# Altium PCB XBEE_BREAKOUT.PcbDoc
Units mil, origin at the board's own origin, x right, y up, seen from the top; angles counter-clockwise.
Board outline 2080 x 2075 mil, 2 copper layers (Top Layer, Bottom Layer); 9 components, 23 nets, 79 pads, 32 vias.
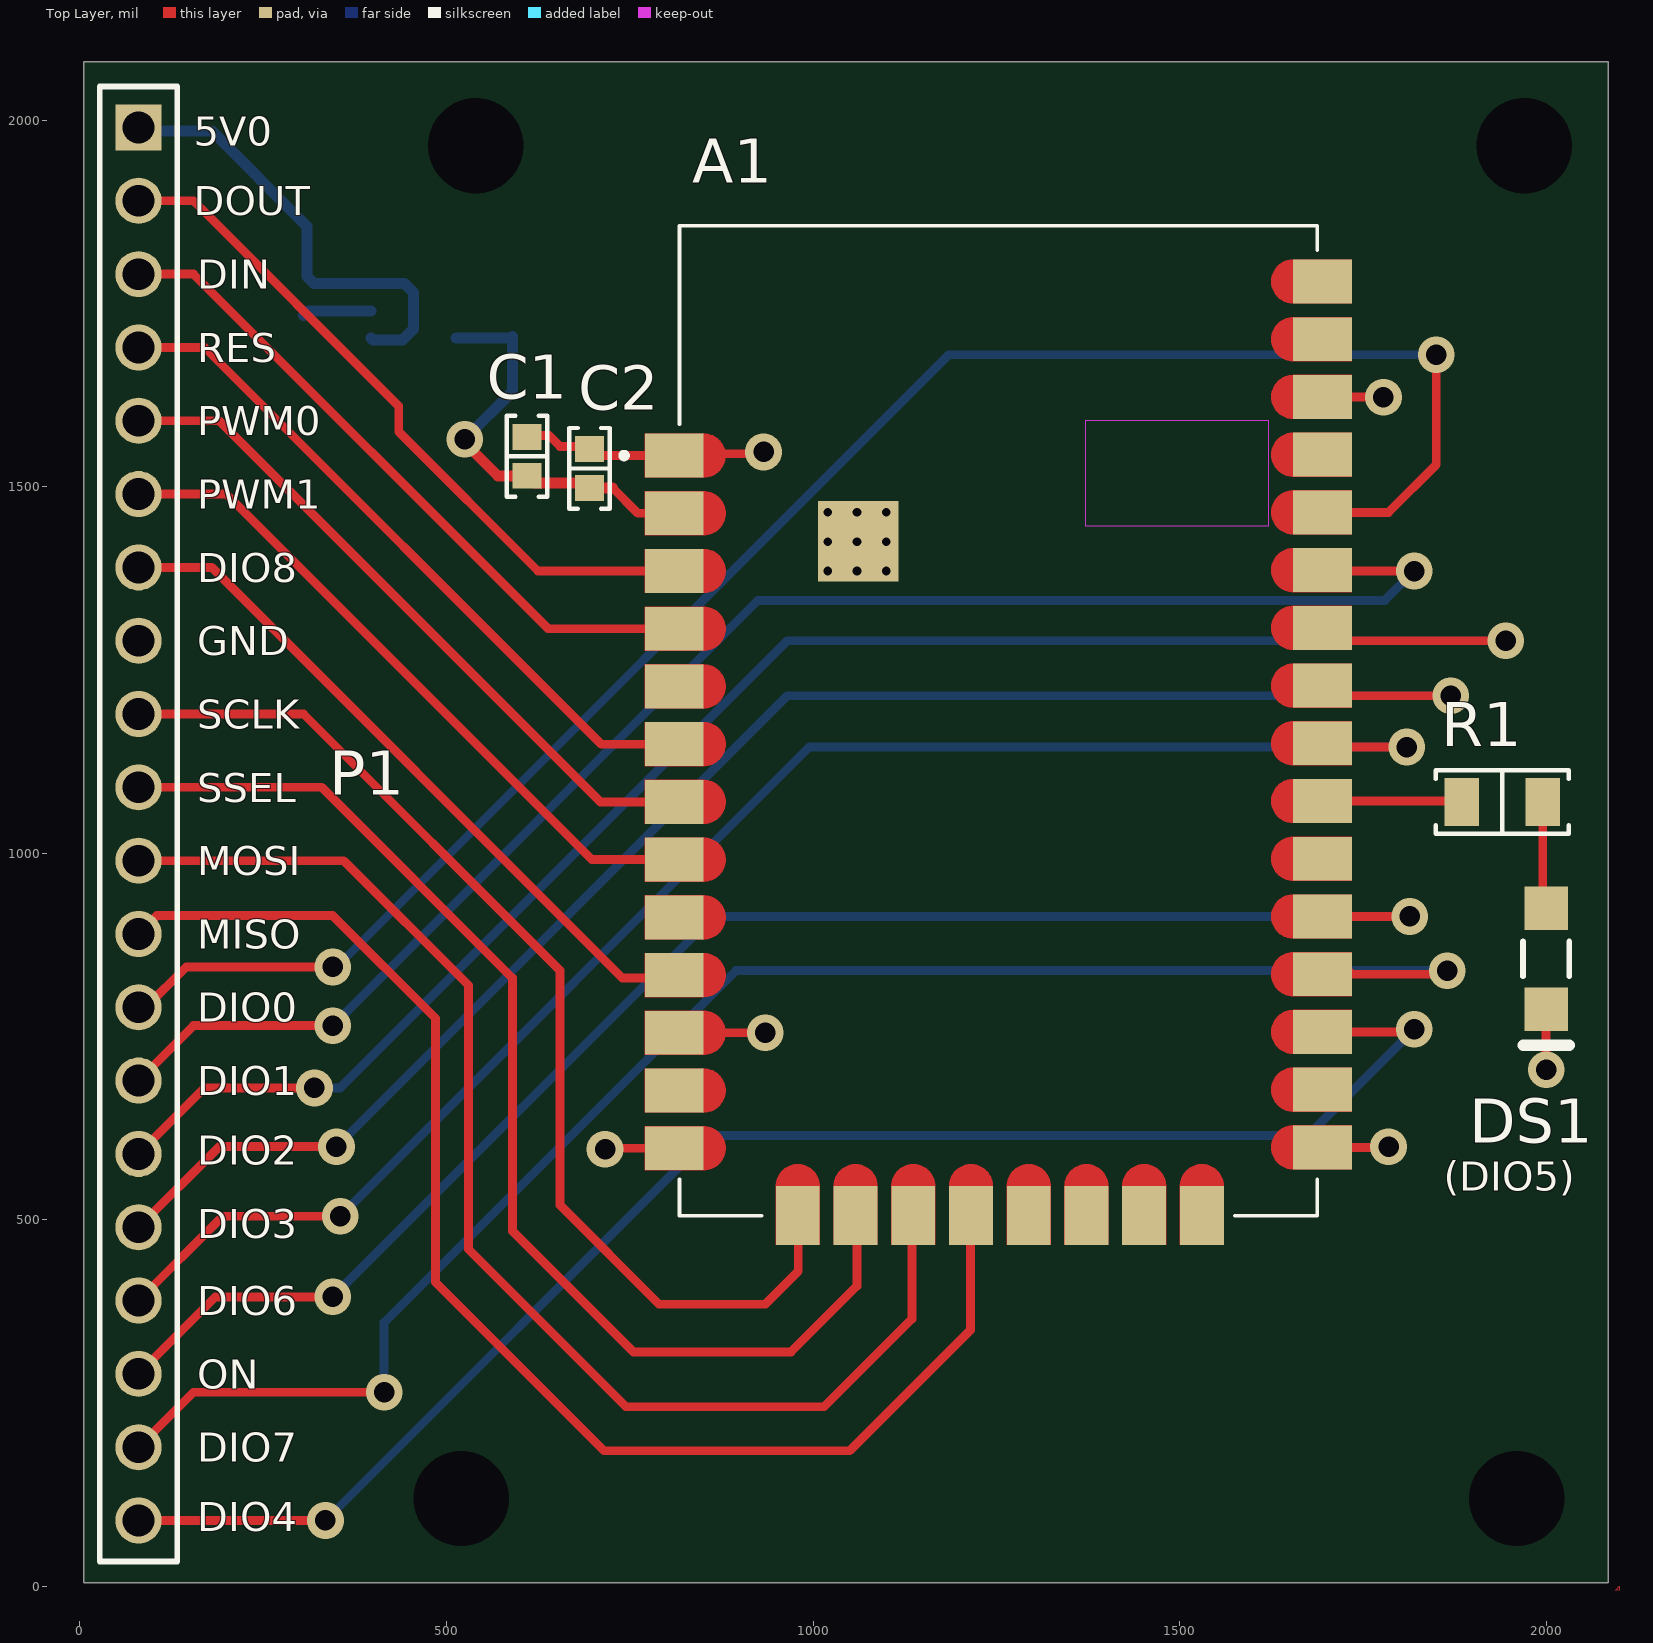
[diagram p0: Top Layer view]
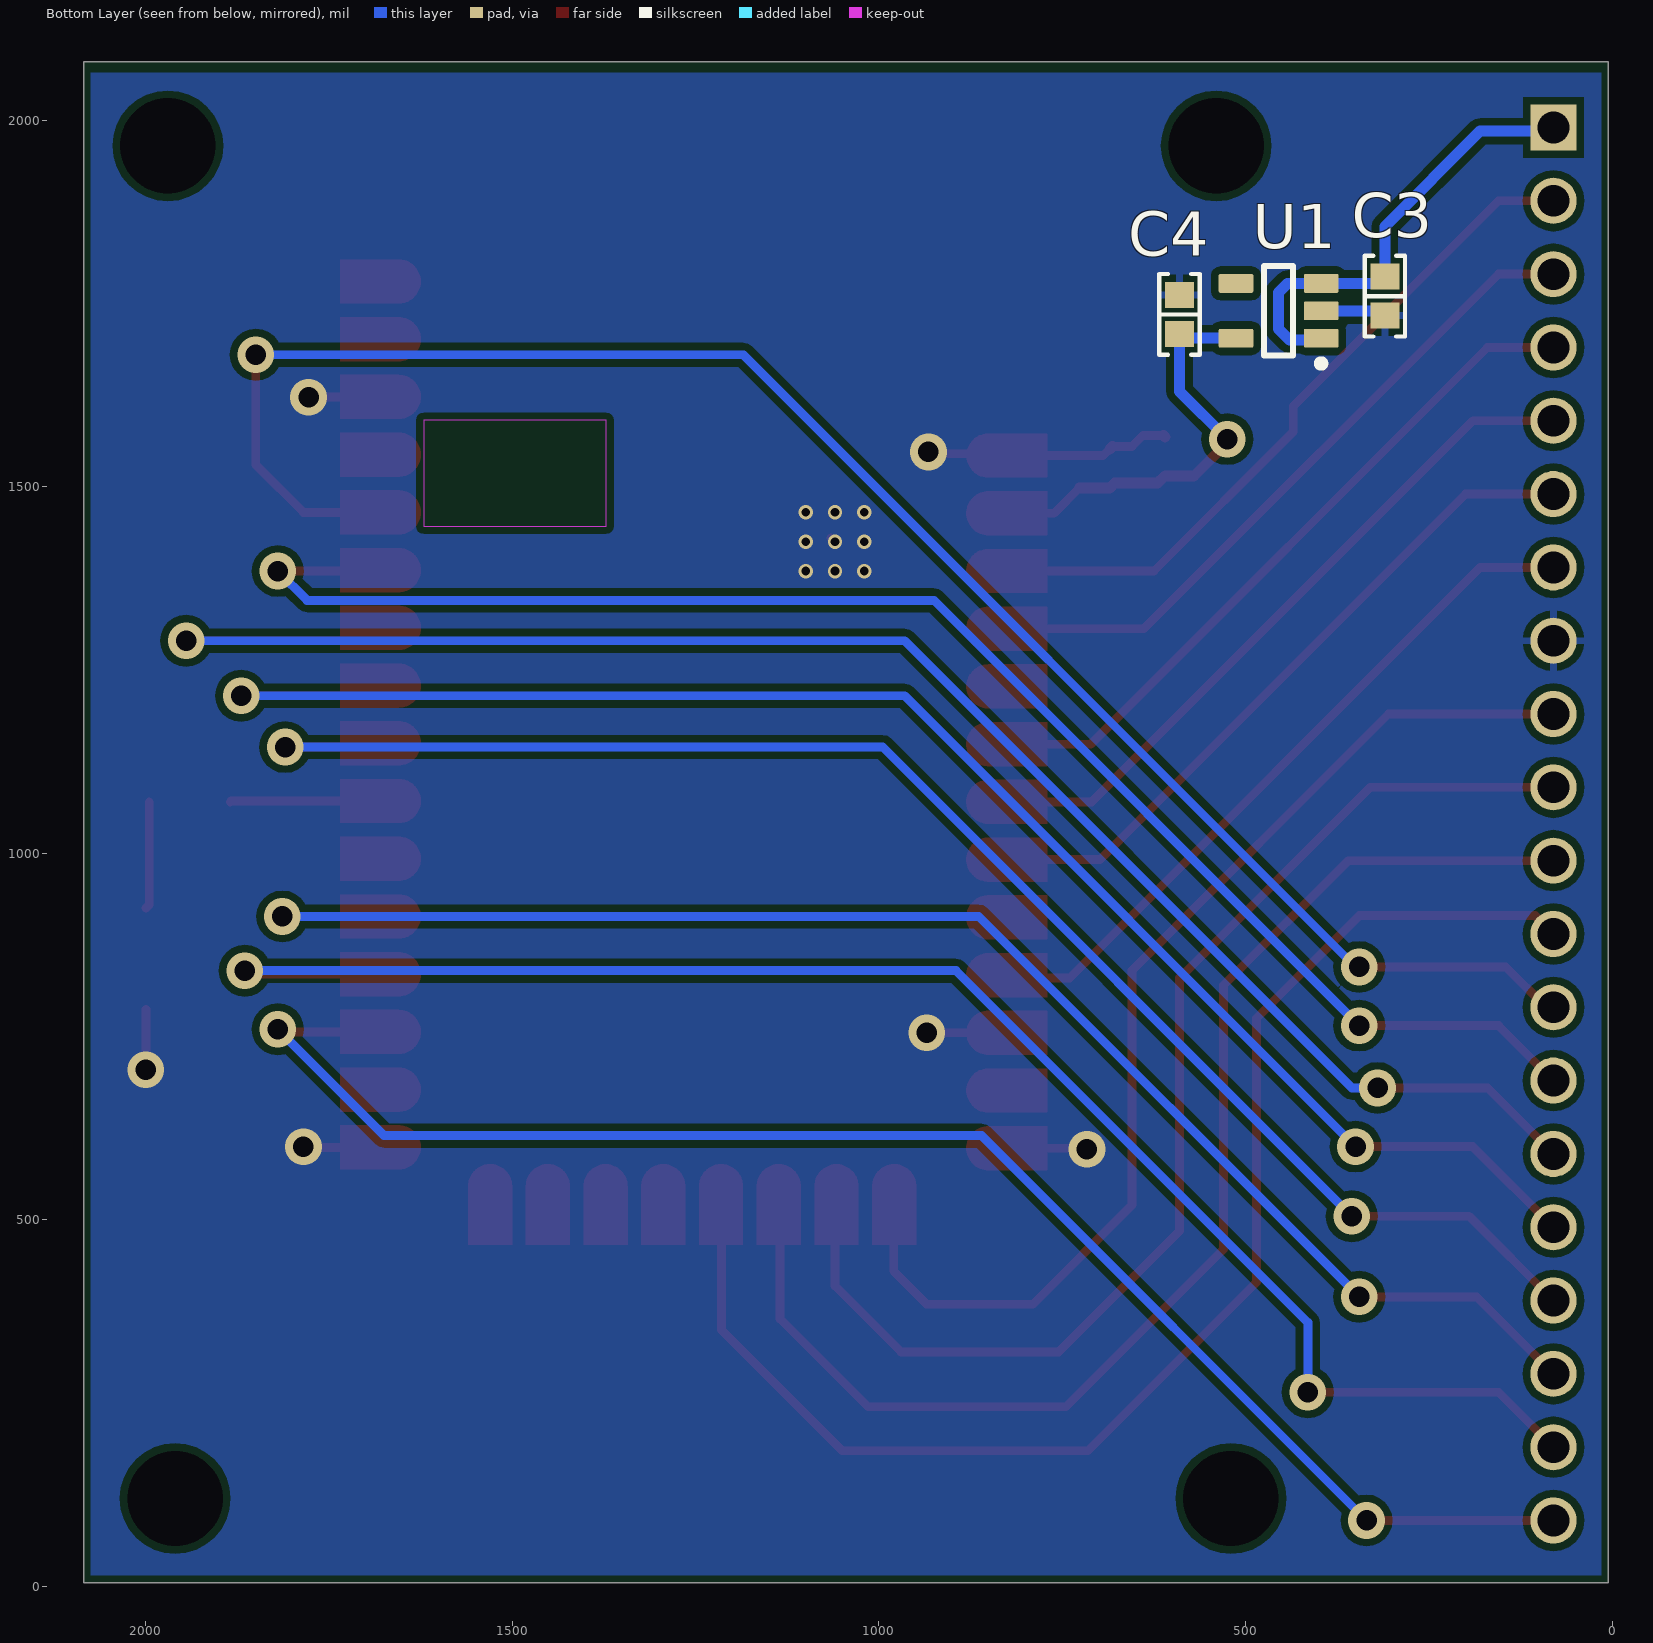
[diagram p1: Bottom Layer view, seen from below]
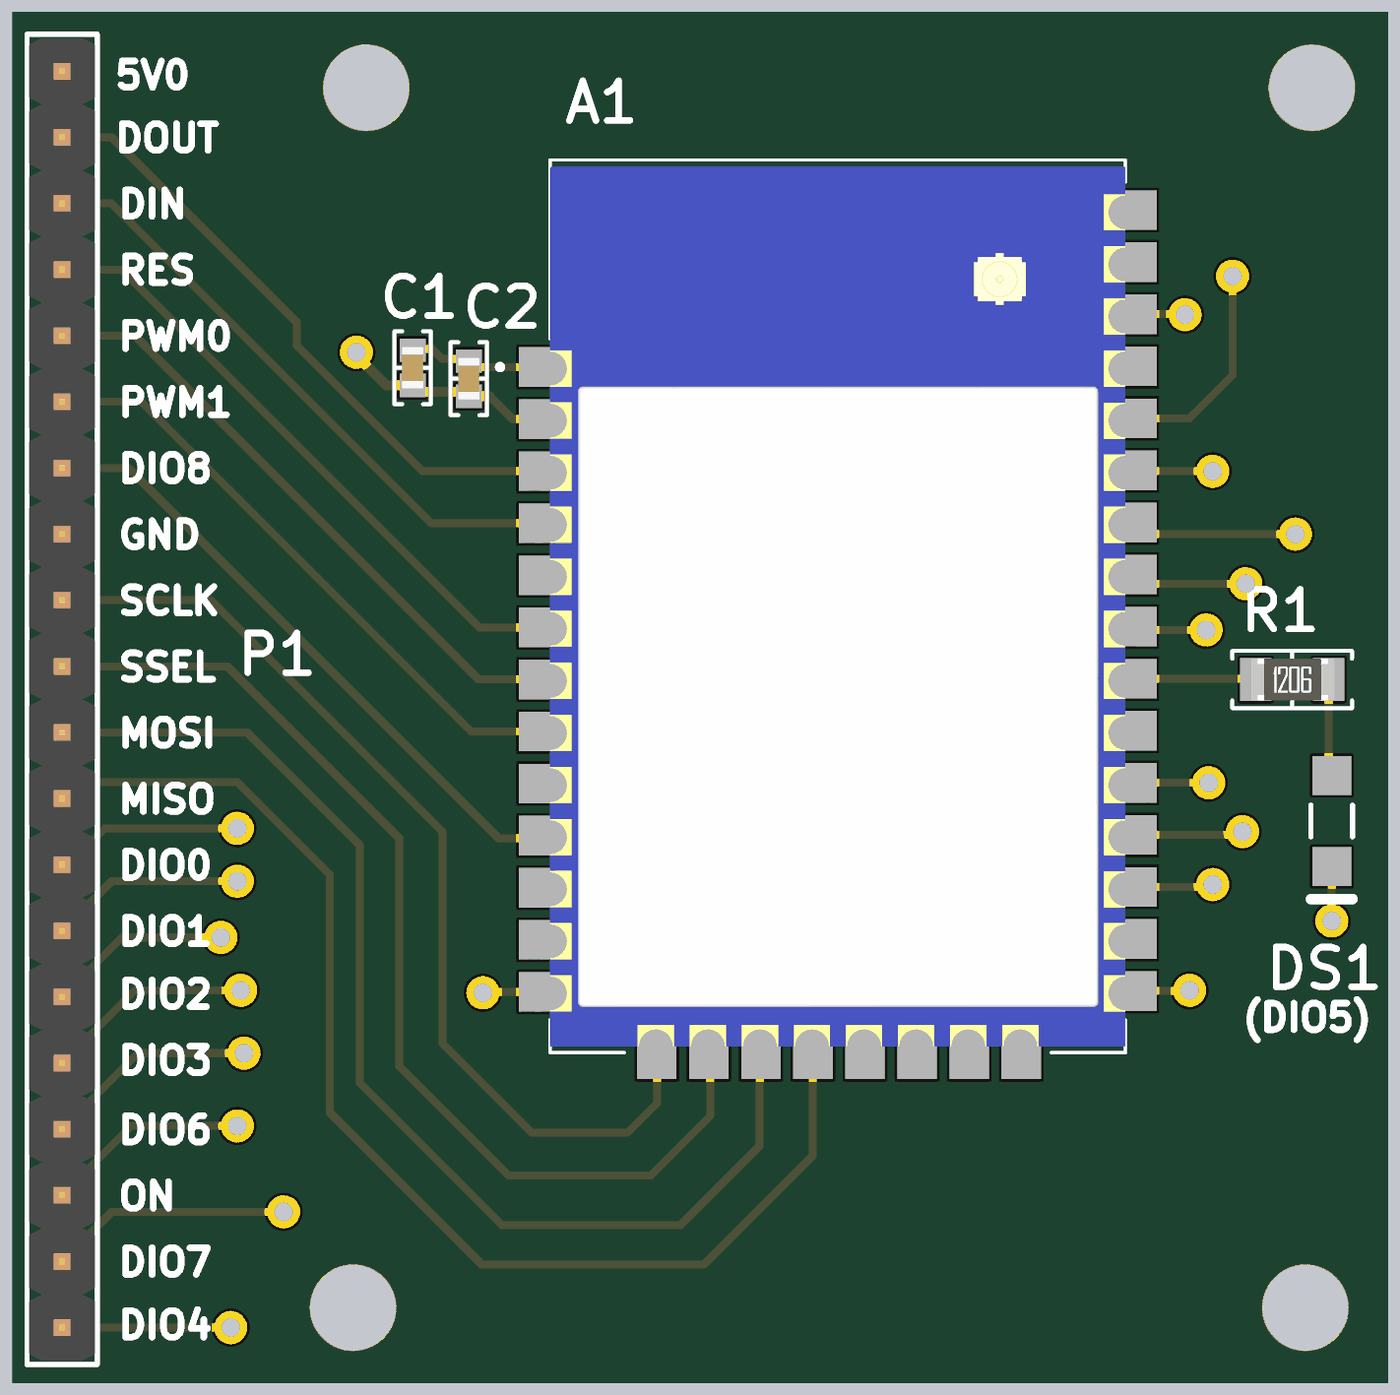
[diagram p2: 3D render of the assembled board from above, using the file's embedded part models]

## Layer stack, top to bottom
Top Solder: solder mask 0.4, Solder Resist, Dk 3.5
Top Layer: signal copper 1.4
Dielectric 1: dielectric 12.6, FR-4, Dk 4.8
Bottom Layer: signal copper 1.4
Bottom Solder: solder mask 0.4, Solder Resist, Dk 3.5

## Board outline
5,2080 2085,2080 2085,5 5,5

## Design rules (kind name [scope] priority, off if disabled: settings)
Clearance [All] p1: gap=10 ignorepadtopadclearanceinfootprint=FALSE except(0: Arc-Hole Track-Hole SMDPad-Hole THPad-Hole Via-Hole Fill-Hole Poly-Hole Region-Hole Text-Hole)
PolygonConnect [All] p1: thpad.connectstyle=Relief thpad.reliefconductorwidth=10 thpad.reliefentries=4 thpad.polygonreliefangle="90 Angle" thpad.airgapwidth=10 smdpad.connectstyle=Relief smdpad.reliefconductorwidth=10 smdpad.reliefentries=4 smdpad.polygonreliefangle="90 Angle" smdpad.airgapwidth=10 via.connectstyle=Direct via.reliefconductorwidth=10 via.reliefentries=4 via.polygonreliefangle="90 Angle" via.airgapwidth=10
RoutingVias [All] p1: holewidth=28 width=50 viastyle="Through Hole" minholewidth=28 minwidth=50 maxholewidth=28 maxwidth=50
SolderMaskExpansion [All] p1: expansion=4
Width [All] p1: maxlimit=10 minlimit=10 preferedwidth=10
30 further rules are at their usual default settings.

## Components (designator, comment, footprint, x,y, rotation, side; value= is the part's Value field where it differs from the comment)
A1 "DIGI XBEE SMT" *XCVR_XBP9X-DMUS-001 1252.87,1180.79 r0 top
C1 "1µF" "CAP 0603_1608" 610,1541.57 r270 top
C2 "100pF" "CAP 0603_1608" 695,1525 r270 top
C3 "1µF" "CAP 0603_1608" 310,1760 r90 bottom
C4 "1µF" "CAP 0603_1608" 590,1735 r270 bottom
DS1 "HSMG-C150" AVAG-HSMX-C150_V 2000,856.1 r270 top
P1 "61302011121" 61302011121 80,1040 r270 top
R1 "56 Ohms" "RES 1206_3216" 1940.12,1070 r0 top
U1 "TLV70033DDCR" DDC0005A_M 455,1740 r0 bottom

## Footprints (in the part's own frame and the unit in brackets; to place one, negate y for a bottom-side part, rotate by r counter-clockwise, add the part's x,y. Pads: shape width x height; smd on the part's side, far side on the other; paste and mask are expansions set on the pad)
61302011121 [mm] "Pin Header, pitch 2.54 mm, THT, Vertical, single row, 20p"
  rect 1.6x1.6 hole 1.1: 1(-24.13,0)
  round 1.6 hole 1.1: 2(-21.59,0) 3(-19.05,0) 4(-16.51,0) 5(-13.97,0) 6(-11.43,0) 7(-8.89,0) 8(-6.35,0) 9(-3.81,0) 10(-1.27,0) 11(1.27,0) 12(3.81,0) 13(6.35,0) 14(8.89,0) 15(11.43,0) 16(13.97,0) 17(16.51,0) 18(19.05,0) 19(21.59,0) 20(24.13,0)
  silkscreen extent -25.55,-1.35 25.55,1.35, body extent -25.4,-1.27 25.4,1.27, height 8.57
*XCVR_XBP9X-DMUS-001 [mm]
  rect 2.04x1.52 smd: 1(-11.23,9.19) 2(-11.23,7.19) 3(-11.23,5.19) 4(-11.23,3.19) 5(-11.23,1.19) 6(-11.23,-0.81) 7(-11.23,-2.81) 8(-11.23,-4.81) 9(-11.23,-6.81) 10(-11.23,-8.81) 11(-11.23,-10.81) 12(-11.23,-12.81) 13(-11.23,-14.81) 22(11.23,-14.78) 23(11.23,-12.78) 24(11.23,-10.78) 25(11.23,-8.78) 26(11.23,-6.78) 27(11.23,-4.78) 28(11.23,-2.78) 29(11.23,-0.78) 30(11.23,1.22) 31(11.23,3.22) 32(11.23,5.22) 33(11.23,7.22) 34(11.23,9.22) 35(11.23,11.22) 36(11.23,13.22) 37(11.23,15.22)
  rect 1.52x2.04 smd: 14(-6.95,-17.14) 15(-4.95,-17.14) 16(-2.95,-17.14) 17(-0.95,-17.14) 18(1.05,-17.14) 19(3.05,-17.14) 20(5.05,-17.14) 21(7.05,-17.14)
  rect 2.79x2.79 smd: 38(-4.855,6.225)
  Top Layer region: 12.25,14.46 12.25,15.98 10.21,15.98 10.17,15.979 10.131,15.976 10.091,15.971 10.052,15.963 10.013,15.954 9.975,15.943 9.938,15.93 9.901,15.914 9.865,15.897 9.83,15.878 9.796,15.857 9.763,15.835 9.732,15.811 9.701,15.785 9.673,15.757 9.645,15.729 9.619,15.698 9.595,15.667 9.573,15.634 9.552,15.6 9.533,15.565 9.516,15.529 9.5,15.492 9.487,15.455 9.476,15.417 9.467,15.378 9.459,15.339 9.454,15.299 9.451,15.26 9.45,15.22 9.451,15.18 9.454,15.141 9.459,15.101 9.467,15.062 9.476,15.023 9.487,14.985 9.5,14.948 9.516,14.911 9.533,14.875 9.552,14.84 9.573,14.806 9.595,14.773 9.619,14.742 9.645,14.711 9.673,14.683 9.701,14.655 9.732,14.629 9.763,14.605 9.796,14.583 9.83,14.562 9.865,14.543 9.901,14.526 9.938,14.51 9.975,14.497 10.013,14.486 10.052,14.477 10.091,14.469 10.131,14.464 10.17,14.461 10.21,14.46 12.25,14.46
  Top Layer region: 12.25,12.46 12.25,13.98 10.21,13.98 10.17,13.979 10.131,13.976 10.091,13.971 10.052,13.963 10.013,13.954 9.975,13.943 9.938,13.929 9.901,13.914 9.865,13.897 9.83,13.878 9.796,13.857 9.763,13.835 9.732,13.811 9.701,13.785 9.673,13.757 9.645,13.728 9.619,13.698 9.595,13.667 9.573,13.634 9.552,13.6 9.533,13.565 9.516,13.529 9.5,13.492 9.487,13.455 9.476,13.417 9.467,13.378 9.459,13.339 9.454,13.299 9.451,13.26 9.45,13.22 9.451,13.18 9.454,13.141 9.459,13.101 9.467,13.062 9.476,13.023 9.487,12.985 9.5,12.948 9.516,12.911 9.533,12.875 9.552,12.84 9.573,12.806 9.595,12.773 9.619,12.742 9.645,12.712 9.673,12.683 9.701,12.655 9.732,12.629 9.763,12.605 9.796,12.583 9.83,12.562 9.865,12.543 9.901,12.526 9.938,12.511 9.975,12.497 10.013,12.486 10.052,12.477 10.091,12.469 10.131,12.464 10.17,12.461 10.21,12.46 12.25,12.46
  Top Layer region: 12.25,10.46 12.25,11.98 10.21,11.98 10.17,11.979 10.131,11.976 10.091,11.971 10.052,11.963 10.013,11.954 9.975,11.943 9.938,11.93 9.901,11.914 9.865,11.897 9.83,11.878 9.796,11.857 9.763,11.835 9.732,11.811 9.701,11.785 9.673,11.757 9.645,11.729 9.619,11.698 9.595,11.667 9.573,11.634 9.552,11.6 9.533,11.565 9.516,11.529 9.5,11.492 9.487,11.455 9.476,11.417 9.467,11.378 9.459,11.339 9.454,11.299 9.451,11.26 9.45,11.22 9.451,11.18 9.454,11.141 9.459,11.101 9.467,11.062 9.476,11.023 9.487,10.985 9.5,10.948 9.516,10.911 9.533,10.875 9.552,10.84 9.573,10.806 9.595,10.773 9.619,10.742 9.645,10.712 9.673,10.683 9.701,10.655 9.732,10.629 9.763,10.605 9.796,10.583 9.83,10.562 9.865,10.543 9.901,10.526 9.938,10.51 9.975,10.497 10.013,10.486 10.052,10.477 10.091,10.469 10.131,10.464 10.17,10.461 10.21,10.46 12.25,10.46
  Top Layer region: 12.25,8.46 12.25,9.98 10.21,9.98 10.17,9.979 10.131,9.976 10.091,9.971 10.052,9.963 10.013,9.954 9.975,9.943 9.938,9.93 9.901,9.914 9.865,9.897 9.83,9.878 9.796,9.857 9.763,9.835 9.732,9.811 9.701,9.785 9.673,9.757 9.645,9.729 9.619,9.698 9.595,9.667 9.573,9.634 9.552,9.6 9.533,9.565 9.516,9.529 9.5,9.492 9.487,9.455 9.476,9.417 9.467,9.378 9.459,9.339 9.454,9.299 9.451,9.26 9.45,9.22 9.451,9.18 9.454,9.141 9.459,9.101 9.467,9.062 9.476,9.023 9.487,8.985 9.5,8.948 9.516,8.911 9.533,8.875 9.552,8.84 9.573,8.806 9.595,8.773 9.619,8.742 9.645,8.711 9.673,8.683 9.701,8.655 9.732,8.629 9.763,8.605 9.796,8.583 9.83,8.562 9.865,8.543 9.901,8.526 9.938,8.51 9.975,8.497 10.013,8.486 10.052,8.477 10.091,8.469 10.131,8.464 10.17,8.461 10.21,8.46 12.25,8.46
  Top Layer region: 12.25,6.46 12.25,7.98 10.21,7.98 10.17,7.979 10.131,7.976 10.091,7.971 10.052,7.963 10.013,7.954 9.975,7.943 9.938,7.93 9.901,7.914 9.865,7.897 9.83,7.878 9.796,7.857 9.763,7.835 9.732,7.811 9.701,7.785 9.673,7.757 9.645,7.729 9.619,7.698 9.595,7.667 9.573,7.634 9.552,7.6 9.533,7.565 9.516,7.529 9.5,7.492 9.487,7.455 9.476,7.417 9.467,7.378 9.459,7.339 9.454,7.299 9.451,7.26 9.45,7.22 9.451,7.18 9.454,7.141 9.459,7.101 9.467,7.062 9.476,7.023 9.487,6.985 9.5,6.948 9.516,6.911 9.533,6.875 9.552,6.84 9.573,6.806 9.595,6.773 9.619,6.742 9.645,6.711 9.673,6.683 9.701,6.655 9.732,6.629 9.763,6.605 9.796,6.583 9.83,6.562 9.865,6.543 9.901,6.526 9.938,6.51 9.975,6.497 10.013,6.486 10.052,6.477 10.091,6.469 10.131,6.464 10.17,6.461 10.21,6.46 12.25,6.46
  Top Layer region: 12.25,4.46 12.25,5.98 10.21,5.98 10.17,5.979 10.131,5.976 10.091,5.971 10.052,5.963 10.013,5.954 9.975,5.943 9.938,5.93 9.901,5.914 9.865,5.897 9.83,5.878 9.796,5.857 9.763,5.835 9.732,5.811 9.701,5.785 9.673,5.757 9.645,5.729 9.619,5.698 9.595,5.667 9.573,5.634 9.552,5.6 9.533,5.565 9.516,5.529 9.5,5.492 9.487,5.455 9.476,5.417 9.467,5.378 9.459,5.339 9.454,5.299 9.451,5.26 9.45,5.22 9.451,5.18 9.454,5.141 9.459,5.101 9.467,5.062 9.476,5.023 9.487,4.985 9.5,4.948 9.516,4.911 9.533,4.875 9.552,4.84 9.573,4.806 9.595,4.773 9.619,4.742 9.645,4.711 9.673,4.683 9.701,4.655 9.732,4.629 9.763,4.605 9.796,4.583 9.83,4.562 9.865,4.543 9.901,4.526 9.938,4.51 9.975,4.497 10.013,4.486 10.052,4.477 10.091,4.469 10.131,4.464 10.17,4.461 10.21,4.46 12.25,4.46
  Top Layer region: 12.25,2.46 12.25,3.98 10.21,3.98 10.17,3.979 10.131,3.976 10.091,3.971 10.052,3.963 10.013,3.954 9.975,3.943 9.938,3.93 9.901,3.914 9.865,3.897 9.83,3.878 9.796,3.857 9.763,3.835 9.732,3.811 9.701,3.785 9.673,3.757 9.645,3.729 9.619,3.698 9.595,3.667 9.573,3.634 9.552,3.6 9.533,3.565 9.516,3.529 9.5,3.492 9.487,3.455 9.476,3.417 9.467,3.378 9.459,3.339 9.454,3.299 9.451,3.26 9.45,3.22 9.451,3.18 9.454,3.141 9.459,3.101 9.467,3.062 9.476,3.023 9.487,2.985 9.5,2.948 9.516,2.911 9.533,2.875 9.552,2.84 9.573,2.806 9.595,2.773 9.619,2.742 9.645,2.711 9.673,2.683 9.701,2.655 9.732,2.629 9.763,2.605 9.796,2.583 9.83,2.562 9.865,2.543 9.901,2.526 9.938,2.51 9.975,2.497 10.013,2.486 10.052,2.477 10.091,2.469 10.131,2.464 10.17,2.461 10.21,2.46 12.25,2.46
  Top Layer region: 12.25,0.46 12.25,1.98 10.21,1.98 10.17,1.979 10.131,1.976 10.091,1.971 10.052,1.963 10.013,1.954 9.975,1.943 9.938,1.93 9.901,1.914 9.865,1.897 9.83,1.878 9.796,1.857 9.763,1.835 9.732,1.811 9.701,1.785 9.673,1.757 9.645,1.729 9.619,1.698 9.595,1.667 9.573,1.634 9.552,1.6 9.533,1.565 9.516,1.529 9.5,1.492 9.487,1.455 9.476,1.417 9.467,1.378 9.459,1.339 9.454,1.299 9.451,1.26 9.45,1.22 9.451,1.18 9.454,1.141 9.459,1.101 9.467,1.062 9.476,1.023 9.487,0.985 9.5,0.948 9.516,0.911 9.533,0.875 9.552,0.84 9.573,0.806 9.595,0.773 9.619,0.742 9.645,0.711 9.673,0.683 9.701,0.655 9.732,0.629 9.763,0.605 9.796,0.583 9.83,0.562 9.865,0.543 9.901,0.526 9.938,0.51 9.975,0.497 10.013,0.486 10.052,0.477 10.091,0.469 10.131,0.464 10.17,0.461 10.21,0.46 12.25,0.46
  Top Layer region: 12.25,-1.54 12.25,-0.02 10.21,-0.02 10.17,-0.021 10.131,-0.024 10.091,-0.029 10.052,-0.037 10.013,-0.046 9.975,-0.057 9.938,-0.07 9.901,-0.086 9.865,-0.103 9.83,-0.122 9.796,-0.143 9.763,-0.165 9.732,-0.189 9.701,-0.215 9.673,-0.243 9.645,-0.271 9.619,-0.302 9.595,-0.333 9.573,-0.366 9.552,-0.4 9.533,-0.435 9.516,-0.471 9.5,-0.508 9.487,-0.545 9.476,-0.583 9.467,-0.622 9.459,-0.661 9.454,-0.701 9.451,-0.74 9.45,-0.78 9.451,-0.82 9.454,-0.859 9.459,-0.899 9.467,-0.938 9.476,-0.977 9.487,-1.015 9.5,-1.052 9.516,-1.089 9.533,-1.125 9.552,-1.16 9.573,-1.194 9.595,-1.227 9.619,-1.258 9.645,-1.289 9.673,-1.317 9.701,-1.345 9.732,-1.371 9.763,-1.395 9.796,-1.417 9.83,-1.438 9.865,-1.457 9.901,-1.474 9.938,-1.49 9.975,-1.503 10.013,-1.514 10.052,-1.523 10.091,-1.531 10.131,-1.536 10.17,-1.539 10.21,-1.54 12.25,-1.54
  Top Layer region: 12.25,-3.54 12.25,-2.02 10.21,-2.02 10.17,-2.021 10.131,-2.024 10.091,-2.029 10.052,-2.037 10.013,-2.046 9.975,-2.057 9.938,-2.07 9.901,-2.086 9.865,-2.103 9.83,-2.122 9.796,-2.143 9.763,-2.165 9.732,-2.189 9.701,-2.215 9.673,-2.243 9.645,-2.271 9.619,-2.302 9.595,-2.333 9.573,-2.366 9.552,-2.4 9.533,-2.435 9.516,-2.471 9.5,-2.508 9.487,-2.545 9.476,-2.583 9.467,-2.622 9.459,-2.661 9.454,-2.701 9.451,-2.74 9.45,-2.78 9.451,-2.82 9.454,-2.859 9.459,-2.899 9.467,-2.938 9.476,-2.977 9.487,-3.015 9.5,-3.052 9.516,-3.089 9.533,-3.125 9.552,-3.16 9.573,-3.194 9.595,-3.227 9.619,-3.258 9.645,-3.289 9.673,-3.317 9.701,-3.345 9.732,-3.371 9.763,-3.395 9.796,-3.417 9.83,-3.438 9.865,-3.457 9.901,-3.474 9.938,-3.49 9.975,-3.503 10.013,-3.514 10.052,-3.523 10.091,-3.531 10.131,-3.536 10.17,-3.539 10.21,-3.54 12.25,-3.54
  Top Layer region: 12.25,-5.54 12.25,-4.02 10.21,-4.02 10.17,-4.021 10.131,-4.024 10.091,-4.029 10.052,-4.037 10.013,-4.046 9.975,-4.057 9.938,-4.07 9.901,-4.086 9.865,-4.103 9.83,-4.122 9.796,-4.143 9.763,-4.165 9.732,-4.189 9.701,-4.215 9.673,-4.243 9.645,-4.271 9.619,-4.302 9.595,-4.333 9.573,-4.366 9.552,-4.4 9.533,-4.435 9.516,-4.471 9.5,-4.508 9.487,-4.545 9.476,-4.583 9.467,-4.622 9.459,-4.661 9.454,-4.701 9.451,-4.74 9.45,-4.78 9.451,-4.82 9.454,-4.859 9.459,-4.899 9.467,-4.938 9.476,-4.977 9.487,-5.015 9.5,-5.052 9.516,-5.089 9.533,-5.125 9.552,-5.16 9.573,-5.194 9.595,-5.227 9.619,-5.258 9.645,-5.289 9.673,-5.317 9.701,-5.345 9.732,-5.371 9.763,-5.395 9.796,-5.417 9.83,-5.438 9.865,-5.457 9.901,-5.474 9.938,-5.49 9.975,-5.503 10.013,-5.514 10.052,-5.523 10.091,-5.531 10.131,-5.536 10.17,-5.539 10.21,-5.54 12.25,-5.54
  Top Layer region: 12.25,-7.54 12.25,-6.02 10.21,-6.02 10.17,-6.021 10.131,-6.024 10.091,-6.029 10.052,-6.037 10.013,-6.046 9.975,-6.057 9.938,-6.07 9.901,-6.086 9.865,-6.103 9.83,-6.122 9.796,-6.143 9.763,-6.165 9.732,-6.189 9.701,-6.215 9.673,-6.243 9.645,-6.271 9.619,-6.302 9.595,-6.333 9.573,-6.366 9.552,-6.4 9.533,-6.435 9.516,-6.471 9.5,-6.508 9.487,-6.545 9.476,-6.583 9.467,-6.622 9.459,-6.661 9.454,-6.701 9.451,-6.74 9.45,-6.78 9.451,-6.82 9.454,-6.859 9.459,-6.899 9.467,-6.938 9.476,-6.977 9.487,-7.015 9.5,-7.052 9.516,-7.089 9.533,-7.125 9.552,-7.16 9.573,-7.194 9.595,-7.227 9.619,-7.258 9.645,-7.289 9.673,-7.317 9.701,-7.345 9.732,-7.371 9.763,-7.395 9.796,-7.417 9.83,-7.438 9.865,-7.457 9.901,-7.474 9.938,-7.49 9.975,-7.503 10.013,-7.514 10.052,-7.523 10.091,-7.531 10.131,-7.536 10.17,-7.539 10.21,-7.54 12.25,-7.54
  Top Layer region: 12.25,-9.54 12.25,-8.02 10.21,-8.02 10.17,-8.021 10.131,-8.024 10.091,-8.029 10.052,-8.037 10.013,-8.046 9.975,-8.057 9.938,-8.07 9.901,-8.086 9.865,-8.103 9.83,-8.122 9.796,-8.143 9.763,-8.165 9.732,-8.189 9.701,-8.215 9.673,-8.243 9.645,-8.271 9.619,-8.302 9.595,-8.333 9.573,-8.366 9.552,-8.4 9.533,-8.435 9.516,-8.471 9.5,-8.508 9.487,-8.545 9.476,-8.583 9.467,-8.622 9.459,-8.661 9.454,-8.701 9.451,-8.74 9.45,-8.78 9.451,-8.82 9.454,-8.859 9.459,-8.899 9.467,-8.938 9.476,-8.977 9.487,-9.015 9.5,-9.052 9.516,-9.089 9.533,-9.125 9.552,-9.16 9.573,-9.194 9.595,-9.227 9.619,-9.258 9.645,-9.289 9.673,-9.317 9.701,-9.345 9.732,-9.371 9.763,-9.395 9.796,-9.417 9.83,-9.438 9.865,-9.457 9.901,-9.474 9.938,-9.49 9.975,-9.503 10.013,-9.514 10.052,-9.523 10.091,-9.531 10.131,-9.536 10.17,-9.539 10.21,-9.54 12.25,-9.54
  Top Layer region: 12.25,-11.54 12.25,-10.02 10.21,-10.02 10.17,-10.021 10.131,-10.024 10.091,-10.029 10.052,-10.037 10.013,-10.046 9.975,-10.057 9.938,-10.071 9.901,-10.086 9.865,-10.103 9.83,-10.122 9.796,-10.143 9.763,-10.165 9.732,-10.189 9.701,-10.215 9.673,-10.243 9.645,-10.272 9.619,-10.302 9.595,-10.333 9.573,-10.366 9.552,-10.4 9.533,-10.435 9.516,-10.471 9.5,-10.508 9.487,-10.545 9.476,-10.583 9.467,-10.622 9.459,-10.661 9.454,-10.701 9.451,-10.74 9.45,-10.78 9.451,-10.82 9.454,-10.859 9.459,-10.899 9.467,-10.938 9.476,-10.977 9.487,-11.015 9.5,-11.052 9.516,-11.089 9.533,-11.125 9.552,-11.16 9.573,-11.194 9.595,-11.227 9.619,-11.258 9.645,-11.288 9.673,-11.317 9.701,-11.345 9.732,-11.371 9.763,-11.395 9.796,-11.417 9.83,-11.438 9.865,-11.457 9.901,-11.474 9.938,-11.489 9.975,-11.503 10.013,-11.514 10.052,-11.523 10.091,-11.531 10.131,-11.536 10.17,-11.539 10.21,-11.54 12.25,-11.54
  Top Layer region: 12.25,-13.54 12.25,-12.02 10.21,-12.02 10.17,-12.021 10.131,-12.024 10.091,-12.029 10.052,-12.037 10.013,-12.046 9.975,-12.057 9.938,-12.07 9.901,-12.086 9.865,-12.103 9.83,-12.122 9.796,-12.143 9.763,-12.165 9.732,-12.189 9.701,-12.215 9.673,-12.243 9.645,-12.271 9.619,-12.302 9.595,-12.333 9.573,-12.366 9.552,-12.4 9.533,-12.435 9.516,-12.471 9.5,-12.508 9.487,-12.545 9.476,-12.583 9.467,-12.622 9.459,-12.661 9.454,-12.701 9.451,-12.74 9.45,-12.78 9.451,-12.82 9.454,-12.859 9.459,-12.899 9.467,-12.938 9.476,-12.977 9.487,-13.015 9.5,-13.052 9.516,-13.089 9.533,-13.125 9.552,-13.16 9.573,-13.194 9.595,-13.227 9.619,-13.258 9.645,-13.289 9.673,-13.317 9.701,-13.345 9.732,-13.371 9.763,-13.395 9.796,-13.417 9.83,-13.438 9.865,-13.457 9.901,-13.474 9.938,-13.49 9.975,-13.503 10.013,-13.514 10.052,-13.523 10.091,-13.531 10.131,-13.536 10.17,-13.539 10.21,-13.54 12.25,-13.54
  Top Layer region: 12.25,-15.54 12.25,-14.02 10.21,-14.02 10.17,-14.021 10.131,-14.024 10.091,-14.029 10.052,-14.037 10.013,-14.046 9.975,-14.057 9.938,-14.071 9.901,-14.086 9.865,-14.103 9.83,-14.122 9.796,-14.143 9.763,-14.165 9.732,-14.189 9.701,-14.215 9.673,-14.243 9.645,-14.272 9.619,-14.302 9.595,-14.333 9.573,-14.366 9.552,-14.4 9.533,-14.435 9.516,-14.471 9.5,-14.508 9.487,-14.545 9.476,-14.583 9.467,-14.622 9.459,-14.661 9.454,-14.701 9.451,-14.74 9.45,-14.78 9.451,-14.82 9.454,-14.859 9.459,-14.899 9.467,-14.938 9.476,-14.977 9.487,-15.015 9.5,-15.052 9.516,-15.089 9.533,-15.125 9.552,-15.16 9.573,-15.194 9.595,-15.227 9.619,-15.258 9.645,-15.288 9.673,-15.317 9.701,-15.345 9.732,-15.371 9.763,-15.395 9.796,-15.417 9.83,-15.438 9.865,-15.457 9.901,-15.474 9.938,-15.489 9.975,-15.503 10.013,-15.514 10.052,-15.523 10.091,-15.531 10.131,-15.536 10.17,-15.539 10.21,-15.54 12.25,-15.54
  Top Layer region: 6.29,-18.16 7.81,-18.16 7.81,-16.12 7.809,-16.08 7.806,-16.041 7.801,-16.001 7.793,-15.962 7.784,-15.923 7.773,-15.885 7.76,-15.848 7.744,-15.811 7.727,-15.775 7.708,-15.74 7.687,-15.706 7.665,-15.673 7.641,-15.642 7.615,-15.612 7.587,-15.583 7.559,-15.555 7.528,-15.529 7.497,-15.505 7.464,-15.483 7.43,-15.462 7.395,-15.443 7.359,-15.426 7.322,-15.411 7.285,-15.397 7.247,-15.386 7.208,-15.377 7.169,-15.369 7.129,-15.364 7.09,-15.361 7.05,-15.36 7.01,-15.361 6.971,-15.364 6.931,-15.369 6.892,-15.377 6.853,-15.386 6.815,-15.397 6.778,-15.411 6.741,-15.426 6.705,-15.443 6.67,-15.462 6.636,-15.483 6.603,-15.505 6.572,-15.529 6.541,-15.555 6.513,-15.583 6.485,-15.612 6.459,-15.642 6.435,-15.673 6.413,-15.706 6.392,-15.74 6.373,-15.775 6.356,-15.811 6.34,-15.848 6.327,-15.885 6.316,-15.923 6.307,-15.962 6.299,-16.001 6.294,-16.041 6.291,-16.08 6.29,-16.12 6.29,-18.16
  Top Layer region: 4.29,-18.16 5.81,-18.16 5.81,-16.12 5.809,-16.08 5.806,-16.041 5.801,-16.001 5.793,-15.962 5.784,-15.923 5.773,-15.885 5.76,-15.848 5.744,-15.811 5.727,-15.775 5.708,-15.74 5.687,-15.706 5.665,-15.673 5.641,-15.642 5.615,-15.612 5.587,-15.583 5.559,-15.555 5.528,-15.529 5.497,-15.505 5.464,-15.483 5.43,-15.462 5.395,-15.443 5.359,-15.426 5.322,-15.411 5.285,-15.397 5.247,-15.386 5.208,-15.377 5.169,-15.369 5.129,-15.364 5.09,-15.361 5.05,-15.36 5.01,-15.361 4.971,-15.364 4.931,-15.369 4.892,-15.377 4.853,-15.386 4.815,-15.397 4.778,-15.411 4.741,-15.426 4.705,-15.443 4.67,-15.462 4.636,-15.483 4.603,-15.505 4.572,-15.529 4.541,-15.555 4.513,-15.583 4.485,-15.612 4.459,-15.642 4.435,-15.673 4.413,-15.706 4.392,-15.74 4.373,-15.775 4.356,-15.811 4.34,-15.848 4.327,-15.885 4.316,-15.923 4.307,-15.962 4.299,-16.001 4.294,-16.041 4.291,-16.08 4.29,-16.12 4.29,-18.16
  Top Layer region: 2.29,-18.16 3.81,-18.16 3.81,-16.12 3.809,-16.08 3.806,-16.041 3.801,-16.001 3.793,-15.962 3.784,-15.923 3.773,-15.885 3.76,-15.848 3.744,-15.811 3.727,-15.775 3.708,-15.74 3.687,-15.706 3.665,-15.673 3.641,-15.642 3.615,-15.612 3.587,-15.583 3.559,-15.555 3.528,-15.529 3.497,-15.505 3.464,-15.483 3.43,-15.462 3.395,-15.443 3.359,-15.426 3.322,-15.411 3.285,-15.397 3.247,-15.386 3.208,-15.377 3.169,-15.369 3.129,-15.364 3.09,-15.361 3.05,-15.36 3.01,-15.361 2.971,-15.364 2.931,-15.369 2.892,-15.377 2.853,-15.386 2.815,-15.397 2.778,-15.411 2.741,-15.426 2.705,-15.443 2.67,-15.462 2.636,-15.483 2.603,-15.505 2.572,-15.529 2.541,-15.555 2.513,-15.583 2.485,-15.612 2.459,-15.642 2.435,-15.673 2.413,-15.706 2.392,-15.74 2.373,-15.775 2.356,-15.811 2.34,-15.848 2.327,-15.885 2.316,-15.923 2.307,-15.962 2.299,-16.001 2.294,-16.041 2.291,-16.08 2.29,-16.12 2.29,-18.16
  Top Layer region: 0.29,-18.16 1.81,-18.16 1.81,-16.12 1.809,-16.08 1.806,-16.041 1.801,-16.001 1.793,-15.962 1.784,-15.923 1.773,-15.885 1.76,-15.848 1.744,-15.811 1.727,-15.775 1.708,-15.74 1.687,-15.706 1.665,-15.673 1.641,-15.642 1.615,-15.612 1.587,-15.583 1.559,-15.555 1.528,-15.529 1.497,-15.505 1.464,-15.483 1.43,-15.462 1.395,-15.443 1.359,-15.426 1.322,-15.411 1.285,-15.397 1.247,-15.386 1.208,-15.377 1.169,-15.369 1.129,-15.364 1.09,-15.361 1.05,-15.36 1.01,-15.361 0.971,-15.364 0.931,-15.369 0.892,-15.377 0.853,-15.386 0.815,-15.397 0.778,-15.411 0.741,-15.426 0.705,-15.443 0.67,-15.462 0.636,-15.483 0.603,-15.505 0.572,-15.529 0.541,-15.555 0.513,-15.583 0.485,-15.612 0.459,-15.642 0.435,-15.673 0.413,-15.706 0.392,-15.74 0.373,-15.775 0.356,-15.811 0.34,-15.848 0.327,-15.885 0.316,-15.923 0.307,-15.962 0.299,-16.001 0.294,-16.041 0.291,-16.08 0.29,-16.12 0.29,-18.16
  Top Layer region: -1.71,-18.16 -0.19,-18.16 -0.19,-16.12 -0.191,-16.08 -0.194,-16.041 -0.199,-16.001 -0.207,-15.962 -0.216,-15.923 -0.227,-15.885 -0.24,-15.848 -0.256,-15.811 -0.273,-15.775 -0.292,-15.74 -0.313,-15.706 -0.335,-15.673 -0.359,-15.642 -0.385,-15.612 -0.413,-15.583 -0.441,-15.555 -0.472,-15.529 -0.503,-15.505 -0.536,-15.483 -0.57,-15.462 -0.605,-15.443 -0.641,-15.426 -0.678,-15.411 -0.715,-15.397 -0.753,-15.386 -0.792,-15.377 -0.831,-15.369 -0.871,-15.364 -0.91,-15.361 -0.95,-15.36 -0.99,-15.361 -1.029,-15.364 -1.069,-15.369 -1.108,-15.377 -1.147,-15.386 -1.185,-15.397 -1.222,-15.411 -1.259,-15.426 -1.295,-15.443 -1.33,-15.462 -1.364,-15.483 -1.397,-15.505 -1.428,-15.529 -1.459,-15.555 -1.487,-15.583 -1.515,-15.612 -1.541,-15.642 -1.565,-15.673 -1.587,-15.706 -1.608,-15.74 -1.627,-15.775 -1.644,-15.811 -1.66,-15.848 -1.673,-15.885 -1.684,-15.923 -1.693,-15.962 -1.701,-16.001 -1.706,-16.041 -1.709,-16.08 -1.71,-16.12 -1.71,-18.16
  Top Layer region: -3.71,-18.16 -2.19,-18.16 -2.19,-16.12 -2.191,-16.08 -2.194,-16.041 -2.199,-16.001 -2.207,-15.962 -2.216,-15.923 -2.227,-15.885 -2.24,-15.848 -2.256,-15.811 -2.273,-15.775 -2.292,-15.74 -2.313,-15.706 -2.335,-15.673 -2.359,-15.642 -2.385,-15.612 -2.413,-15.583 -2.441,-15.555 -2.472,-15.529 -2.503,-15.505 -2.536,-15.483 -2.57,-15.462 -2.605,-15.443 -2.641,-15.426 -2.678,-15.411 -2.715,-15.397 -2.753,-15.386 -2.792,-15.377 -2.831,-15.369 -2.871,-15.364 -2.91,-15.361 -2.95,-15.36 -2.99,-15.361 -3.029,-15.364 -3.069,-15.369 -3.108,-15.377 -3.147,-15.386 -3.185,-15.397 -3.222,-15.411 -3.259,-15.426 -3.295,-15.443 -3.33,-15.462 -3.364,-15.483 -3.397,-15.505 -3.428,-15.529 -3.459,-15.555 -3.487,-15.583 -3.515,-15.612 -3.541,-15.642 -3.565,-15.673 -3.587,-15.706 -3.608,-15.74 -3.627,-15.775 -3.644,-15.811 -3.66,-15.848 -3.673,-15.885 -3.684,-15.923 -3.693,-15.962 -3.701,-16.001 -3.706,-16.041 -3.709,-16.08 -3.71,-16.12 -3.71,-18.16
  Top Layer region: -5.71,-18.16 -4.19,-18.16 -4.19,-16.12 -4.191,-16.08 -4.194,-16.041 -4.199,-16.001 -4.207,-15.962 -4.216,-15.923 -4.227,-15.885 -4.24,-15.848 -4.256,-15.811 -4.273,-15.775 -4.292,-15.74 -4.313,-15.706 -4.335,-15.673 -4.359,-15.642 -4.385,-15.612 -4.413,-15.583 -4.441,-15.555 -4.472,-15.529 -4.503,-15.505 -4.536,-15.483 -4.57,-15.462 -4.605,-15.443 -4.641,-15.426 -4.678,-15.411 -4.715,-15.397 -4.753,-15.386 -4.792,-15.377 -4.831,-15.369 -4.871,-15.364 -4.91,-15.361 -4.95,-15.36 -4.99,-15.361 -5.029,-15.364 -5.069,-15.369 -5.108,-15.377 -5.147,-15.386 -5.185,-15.397 -5.222,-15.411 -5.259,-15.426 -5.295,-15.443 -5.33,-15.462 -5.364,-15.483 -5.397,-15.505 -5.428,-15.529 -5.459,-15.555 -5.487,-15.583 -5.515,-15.612 -5.541,-15.642 -5.565,-15.673 -5.587,-15.706 -5.608,-15.74 -5.627,-15.775 -5.644,-15.811 -5.66,-15.848 -5.673,-15.885 -5.684,-15.923 -5.693,-15.962 -5.701,-16.001 -5.706,-16.041 -5.709,-16.08 -5.71,-16.12 -5.71,-18.16
  Top Layer region: -7.71,-18.16 -6.19,-18.16 -6.19,-16.12 -6.191,-16.08 -6.194,-16.041 -6.199,-16.001 -6.207,-15.962 -6.216,-15.923 -6.227,-15.885 -6.24,-15.848 -6.256,-15.811 -6.273,-15.775 -6.292,-15.74 -6.313,-15.706 -6.335,-15.673 -6.359,-15.642 -6.385,-15.612 -6.413,-15.583 -6.441,-15.555 -6.472,-15.529 -6.503,-15.505 -6.536,-15.483 -6.57,-15.462 -6.605,-15.443 -6.641,-15.426 -6.678,-15.411 -6.715,-15.397 -6.753,-15.386 -6.792,-15.377 -6.831,-15.369 -6.871,-15.364 -6.91,-15.361 -6.95,-15.36 -6.99,-15.361 -7.029,-15.364 -7.069,-15.369 -7.108,-15.377 -7.147,-15.386 -7.185,-15.397 -7.222,-15.411 -7.259,-15.426 -7.295,-15.443 -7.33,-15.462 -7.364,-15.483 -7.397,-15.505 -7.428,-15.529 -7.459,-15.555 -7.487,-15.583 -7.515,-15.612 -7.541,-15.642 -7.565,-15.673 -7.587,-15.706 -7.608,-15.74 -7.627,-15.775 -7.644,-15.811 -7.66,-15.848 -7.673,-15.885 -7.684,-15.923 -7.693,-15.962 -7.701,-16.001 -7.706,-16.041 -7.709,-16.08 -7.71,-16.12 -7.71,-18.16
  Top Layer region: -12.25,-14.05 -12.25,-15.57 -10.21,-15.57 -10.17,-15.569 -10.131,-15.566 -10.091,-15.561 -10.052,-15.553 -10.013,-15.544 -9.975,-15.533 -9.938,-15.519 -9.901,-15.504 -9.865,-15.487 -9.83,-15.468 -9.796,-15.447 -9.763,-15.425 -9.732,-15.401 -9.701,-15.375 -9.673,-15.347 -9.645,-15.319 -9.619,-15.288 -9.595,-15.257 -9.573,-15.224 -9.552,-15.19 -9.533,-15.155 -9.516,-15.119 -9.5,-15.082 -9.487,-15.045 -9.476,-15.007 -9.467,-14.968 -9.459,-14.929 -9.454,-14.889 -9.451,-14.85 -9.45,-14.81 -9.451,-14.77 -9.454,-14.731 -9.459,-14.691 -9.467,-14.652 -9.476,-14.613 -9.487,-14.575 -9.5,-14.538 -9.516,-14.501 -9.533,-14.465 -9.552,-14.43 -9.573,-14.396 -9.595,-14.363 -9.619,-14.332 -9.645,-14.302 -9.673,-14.273 -9.701,-14.245 -9.732,-14.219 -9.763,-14.195 -9.796,-14.173 -9.83,-14.152 -9.865,-14.133 -9.901,-14.116 -9.938,-14.101 -9.975,-14.087 -10.013,-14.076 -10.052,-14.067 -10.091,-14.059 -10.131,-14.054 -10.17,-14.051 -10.21,-14.05 -12.25,-14.05
  Top Layer region: -12.25,-12.05 -12.25,-13.57 -10.21,-13.57 -10.17,-13.569 -10.131,-13.566 -10.091,-13.561 -10.052,-13.553 -10.013,-13.544 -9.975,-13.533 -9.938,-13.52 -9.901,-13.504 -9.865,-13.487 -9.83,-13.468 -9.796,-13.447 -9.763,-13.425 -9.732,-13.401 -9.701,-13.375 -9.673,-13.347 -9.645,-13.319 -9.619,-13.288 -9.595,-13.257 -9.573,-13.224 -9.552,-13.19 -9.533,-13.155 -9.516,-13.119 -9.5,-13.082 -9.487,-13.045 -9.476,-13.007 -9.467,-12.968 -9.459,-12.929 -9.454,-12.889 -9.451,-12.85 -9.45,-12.81 -9.451,-12.77 -9.454,-12.731 -9.459,-12.691 -9.467,-12.652 -9.476,-12.613 -9.487,-12.575 -9.5,-12.538 -9.516,-12.501 -9.533,-12.465 -9.552,-12.43 -9.573,-12.396 -9.595,-12.363 -9.619,-12.332 -9.645,-12.301 -9.673,-12.273 -9.701,-12.245 -9.732,-12.219 -9.763,-12.195 -9.796,-12.173 -9.83,-12.152 -9.865,-12.133 -9.901,-12.116 -9.938,-12.1 -9.975,-12.087 -10.013,-12.076 -10.052,-12.067 -10.091,-12.059 -10.131,-12.054 -10.17,-12.051 -10.21,-12.05 -12.25,-12.05
  Top Layer region: -12.25,-10.05 -12.25,-11.57 -10.21,-11.57 -10.17,-11.569 -10.131,-11.566 -10.091,-11.561 -10.052,-11.553 -10.013,-11.544 -9.975,-11.533 -9.938,-11.519 -9.901,-11.504 -9.865,-11.487 -9.83,-11.468 -9.796,-11.447 -9.763,-11.425 -9.732,-11.401 -9.701,-11.375 -9.673,-11.347 -9.645,-11.318 -9.619,-11.288 -9.595,-11.257 -9.573,-11.224 -9.552,-11.19 -9.533,-11.155 -9.516,-11.119 -9.5,-11.082 -9.487,-11.045 -9.476,-11.007 -9.467,-10.968 -9.459,-10.929 -9.454,-10.889 -9.451,-10.85 -9.45,-10.81 -9.451,-10.77 -9.454,-10.731 -9.459,-10.691 -9.467,-10.652 -9.476,-10.613 -9.487,-10.575 -9.5,-10.538 -9.516,-10.501 -9.533,-10.465 -9.552,-10.43 -9.573,-10.396 -9.595,-10.363 -9.619,-10.332 -9.645,-10.302 -9.673,-10.273 -9.701,-10.245 -9.732,-10.219 -9.763,-10.195 -9.796,-10.173 -9.83,-10.152 -9.865,-10.133 -9.901,-10.116 -9.938,-10.101 -9.975,-10.087 -10.013,-10.076 -10.052,-10.067 -10.091,-10.059 -10.131,-10.054 -10.17,-10.051 -10.21,-10.05 -12.25,-10.05
  Top Layer region: -12.25,-8.05 -12.25,-9.57 -10.21,-9.57 -10.17,-9.569 -10.131,-9.566 -10.091,-9.561 -10.052,-9.553 -10.013,-9.544 -9.975,-9.533 -9.938,-9.52 -9.901,-9.504 -9.865,-9.487 -9.83,-9.468 -9.796,-9.447 -9.763,-9.425 -9.732,-9.401 -9.701,-9.375 -9.673,-9.347 -9.645,-9.319 -9.619,-9.288 -9.595,-9.257 -9.573,-9.224 -9.552,-9.19 -9.533,-9.155 -9.516,-9.119 -9.5,-9.082 -9.487,-9.045 -9.476,-9.007 -9.467,-8.968 -9.459,-8.929 -9.454,-8.889 -9.451,-8.85 -9.45,-8.81 -9.451,-8.77 -9.454,-8.731 -9.459,-8.691 -9.467,-8.652 -9.476,-8.613 -9.487,-8.575 -9.5,-8.538 -9.516,-8.501 -9.533,-8.465 -9.552,-8.43 -9.573,-8.396 -9.595,-8.363 -9.619,-8.332 -9.645,-8.301 -9.673,-8.273 -9.701,-8.245 -9.732,-8.219 -9.763,-8.195 -9.796,-8.173 -9.83,-8.152 -9.865,-8.133 -9.901,-8.116 -9.938,-8.1 -9.975,-8.087 -10.013,-8.076 -10.052,-8.067 -10.091,-8.059 -10.131,-8.054 -10.17,-8.051 -10.21,-8.05 -12.25,-8.05
  Top Layer region: -12.25,-6.05 -12.25,-7.57 -10.21,-7.57 -10.17,-7.569 -10.131,-7.566 -10.091,-7.561 -10.052,-7.553 -10.013,-7.544 -9.975,-7.533 -9.938,-7.52 -9.901,-7.504 -9.865,-7.487 -9.83,-7.468 -9.796,-7.447 -9.763,-7.425 -9.732,-7.401 -9.701,-7.375 -9.673,-7.347 -9.645,-7.319 -9.619,-7.288 -9.595,-7.257 -9.573,-7.224 -9.552,-7.19 -9.533,-7.155 -9.516,-7.119 -9.5,-7.082 -9.487,-7.045 -9.476,-7.007 -9.467,-6.968 -9.459,-6.929 -9.454,-6.889 -9.451,-6.85 -9.45,-6.81 -9.451,-6.77 -9.454,-6.731 -9.459,-6.691 -9.467,-6.652 -9.476,-6.613 -9.487,-6.575 -9.5,-6.538 -9.516,-6.501 -9.533,-6.465 -9.552,-6.43 -9.573,-6.396 -9.595,-6.363 -9.619,-6.332 -9.645,-6.301 -9.673,-6.273 -9.701,-6.245 -9.732,-6.219 -9.763,-6.195 -9.796,-6.173 -9.83,-6.152 -9.865,-6.133 -9.901,-6.116 -9.938,-6.1 -9.975,-6.087 -10.013,-6.076 -10.052,-6.067 -10.091,-6.059 -10.131,-6.054 -10.17,-6.051 -10.21,-6.05 -12.25,-6.05
  Top Layer region: -12.25,-4.05 -12.25,-5.57 -10.21,-5.57 -10.17,-5.569 -10.131,-5.566 -10.091,-5.561 -10.052,-5.553 -10.013,-5.544 -9.975,-5.533 -9.938,-5.52 -9.901,-5.504 -9.865,-5.487 -9.83,-5.468 -9.796,-5.447 -9.763,-5.425 -9.732,-5.401 -9.701,-5.375 -9.673,-5.347 -9.645,-5.319 -9.619,-5.288 -9.595,-5.257 -9.573,-5.224 -9.552,-5.19 -9.533,-5.155 -9.516,-5.119 -9.5,-5.082 -9.487,-5.045 -9.476,-5.007 -9.467,-4.968 -9.459,-4.929 -9.454,-4.889 -9.451,-4.85 -9.45,-4.81 -9.451,-4.77 -9.454,-4.731 -9.459,-4.691 -9.467,-4.652 -9.476,-4.613 -9.487,-4.575 -9.5,-4.538 -9.516,-4.501 -9.533,-4.465 -9.552,-4.43 -9.573,-4.396 -9.595,-4.363 -9.619,-4.332 -9.645,-4.301 -9.673,-4.273 -9.701,-4.245 -9.732,-4.219 -9.763,-4.195 -9.796,-4.173 -9.83,-4.152 -9.865,-4.133 -9.901,-4.116 -9.938,-4.1 -9.975,-4.087 -10.013,-4.076 -10.052,-4.067 -10.091,-4.059 -10.131,-4.054 -10.17,-4.051 -10.21,-4.05 -12.25,-4.05
  Top Layer region: -12.25,-2.05 -12.25,-3.57 -10.21,-3.57 -10.17,-3.569 -10.131,-3.566 -10.091,-3.561 -10.052,-3.553 -10.013,-3.544 -9.975,-3.533 -9.938,-3.52 -9.901,-3.504 -9.865,-3.487 -9.83,-3.468 -9.796,-3.447 -9.763,-3.425 -9.732,-3.401 -9.701,-3.375 -9.673,-3.347 -9.645,-3.319 -9.619,-3.288 -9.595,-3.257 -9.573,-3.224 -9.552,-3.19 -9.533,-3.155 -9.516,-3.119 -9.5,-3.082 -9.487,-3.045 -9.476,-3.007 -9.467,-2.968 -9.459,-2.929 -9.454,-2.889 -9.451,-2.85 -9.45,-2.81 -9.451,-2.77 -9.454,-2.731 -9.459,-2.691 -9.467,-2.652 -9.476,-2.613 -9.487,-2.575 -9.5,-2.538 -9.516,-2.501 -9.533,-2.465 -9.552,-2.43 -9.573,-2.396 -9.595,-2.363 -9.619,-2.332 -9.645,-2.301 -9.673,-2.273 -9.701,-2.245 -9.732,-2.219 -9.763,-2.195 -9.796,-2.173 -9.83,-2.152 -9.865,-2.133 -9.901,-2.116 -9.938,-2.1 -9.975,-2.087 -10.013,-2.076 -10.052,-2.067 -10.091,-2.059 -10.131,-2.054 -10.17,-2.051 -10.21,-2.05 -12.25,-2.05
  Top Layer region: -12.25,-0.05 -12.25,-1.57 -10.21,-1.57 -10.17,-1.569 -10.131,-1.566 -10.091,-1.561 -10.052,-1.553 -10.013,-1.544 -9.975,-1.533 -9.938,-1.52 -9.901,-1.504 -9.865,-1.487 -9.83,-1.468 -9.796,-1.447 -9.763,-1.425 -9.732,-1.401 -9.701,-1.375 -9.673,-1.347 -9.645,-1.319 -9.619,-1.288 -9.595,-1.257 -9.573,-1.224 -9.552,-1.19 -9.533,-1.155 -9.516,-1.119 -9.5,-1.082 -9.487,-1.045 -9.476,-1.007 -9.467,-0.968 -9.459,-0.929 -9.454,-0.889 -9.451,-0.85 -9.45,-0.81 -9.451,-0.77 -9.454,-0.731 -9.459,-0.691 -9.467,-0.652 -9.476,-0.613 -9.487,-0.575 -9.5,-0.538 -9.516,-0.501 -9.533,-0.465 -9.552,-0.43 -9.573,-0.396 -9.595,-0.363 -9.619,-0.332 -9.645,-0.301 -9.673,-0.273 -9.701,-0.245 -9.732,-0.219 -9.763,-0.195 -9.796,-0.173 -9.83,-0.152 -9.865,-0.133 -9.901,-0.116 -9.938,-0.1 -9.975,-0.087 -10.013,-0.076 -10.052,-0.067 -10.091,-0.059 -10.131,-0.054 -10.17,-0.051 -10.21,-0.05 -12.25,-0.05
  Top Layer region: -12.25,1.95 -12.25,0.43 -10.21,0.43 -10.17,0.431 -10.131,0.434 -10.091,0.439 -10.052,0.447 -10.013,0.456 -9.975,0.467 -9.938,0.48 -9.901,0.496 -9.865,0.513 -9.83,0.532 -9.796,0.553 -9.763,0.575 -9.732,0.599 -9.701,0.625 -9.673,0.653 -9.645,0.681 -9.619,0.712 -9.595,0.743 -9.573,0.776 -9.552,0.81 -9.533,0.845 -9.516,0.881 -9.5,0.918 -9.487,0.955 -9.476,0.993 -9.467,1.032 -9.459,1.071 -9.454,1.111 -9.451,1.15 -9.45,1.19 -9.451,1.23 -9.454,1.269 -9.459,1.309 -9.467,1.348 -9.476,1.387 -9.487,1.425 -9.5,1.462 -9.516,1.499 -9.533,1.535 -9.552,1.57 -9.573,1.604 -9.595,1.637 -9.619,1.668 -9.645,1.699 -9.673,1.727 -9.701,1.755 -9.732,1.781 -9.763,1.805 -9.796,1.827 -9.83,1.848 -9.865,1.867 -9.901,1.884 -9.938,1.9 -9.975,1.913 -10.013,1.924 -10.052,1.933 -10.091,1.941 -10.131,1.946 -10.17,1.949 -10.21,1.95 -12.25,1.95
  Top Layer region: -12.25,3.95 -12.25,2.43 -10.21,2.43 -10.17,2.431 -10.131,2.434 -10.091,2.439 -10.052,2.447 -10.013,2.456 -9.975,2.467 -9.938,2.48 -9.901,2.496 -9.865,2.513 -9.83,2.532 -9.796,2.553 -9.763,2.575 -9.732,2.599 -9.701,2.625 -9.673,2.653 -9.645,2.681 -9.619,2.712 -9.595,2.743 -9.573,2.776 -9.552,2.81 -9.533,2.845 -9.516,2.881 -9.5,2.918 -9.487,2.955 -9.476,2.993 -9.467,3.032 -9.459,3.071 -9.454,3.111 -9.451,3.15 -9.45,3.19 -9.451,3.23 -9.454,3.269 -9.459,3.309 -9.467,3.348 -9.476,3.387 -9.487,3.425 -9.5,3.462 -9.516,3.499 -9.533,3.535 -9.552,3.57 -9.573,3.604 -9.595,3.637 -9.619,3.668 -9.645,3.699 -9.673,3.727 -9.701,3.755 -9.732,3.781 -9.763,3.805 -9.796,3.827 -9.83,3.848 -9.865,3.867 -9.901,3.884 -9.938,3.9 -9.975,3.913 -10.013,3.924 -10.052,3.933 -10.091,3.941 -10.131,3.946 -10.17,3.949 -10.21,3.95 -12.25,3.95
  Top Layer region: -12.25,5.95 -12.25,4.43 -10.21,4.43 -10.17,4.431 -10.131,4.434 -10.091,4.439 -10.052,4.447 -10.013,4.456 -9.975,4.467 -9.938,4.48 -9.901,4.496 -9.865,4.513 -9.83,4.532 -9.796,4.553 -9.763,4.575 -9.732,4.599 -9.701,4.625 -9.673,4.653 -9.645,4.681 -9.619,4.712 -9.595,4.743 -9.573,4.776 -9.552,4.81 -9.533,4.845 -9.516,4.881 -9.5,4.918 -9.487,4.955 -9.476,4.993 -9.467,5.032 -9.459,5.071 -9.454,5.111 -9.451,5.15 -9.45,5.19 -9.451,5.23 -9.454,5.269 -9.459,5.309 -9.467,5.348 -9.476,5.387 -9.487,5.425 -9.5,5.462 -9.516,5.499 -9.533,5.535 -9.552,5.57 -9.573,5.604 -9.595,5.637 -9.619,5.668 -9.645,5.699 -9.673,5.727 -9.701,5.755 -9.732,5.781 -9.763,5.805 -9.796,5.827 -9.83,5.848 -9.865,5.867 -9.901,5.884 -9.938,5.9 -9.975,5.913 -10.013,5.924 -10.052,5.933 -10.091,5.941 -10.131,5.946 -10.17,5.949 -10.21,5.95 -12.25,5.95
  Top Layer region: -12.25,7.95 -12.25,6.43 -10.21,6.43 -10.17,6.431 -10.131,6.434 -10.091,6.439 -10.052,6.447 -10.013,6.456 -9.975,6.467 -9.938,6.48 -9.901,6.496 -9.865,6.513 -9.83,6.532 -9.796,6.553 -9.763,6.575 -9.732,6.599 -9.701,6.625 -9.673,6.653 -9.645,6.681 -9.619,6.712 -9.595,6.743 -9.573,6.776 -9.552,6.81 -9.533,6.845 -9.516,6.881 -9.5,6.918 -9.487,6.955 -9.476,6.993 -9.467,7.032 -9.459,7.071 -9.454,7.111 -9.451,7.15 -9.45,7.19 -9.451,7.23 -9.454,7.269 -9.459,7.309 -9.467,7.348 -9.476,7.387 -9.487,7.425 -9.5,7.462 -9.516,7.499 -9.533,7.535 -9.552,7.57 -9.573,7.604 -9.595,7.637 -9.619,7.668 -9.645,7.699 -9.673,7.727 -9.701,7.755 -9.732,7.781 -9.763,7.805 -9.796,7.827 -9.83,7.848 -9.865,7.867 -9.901,7.884 -9.938,7.9 -9.975,7.913 -10.013,7.924 -10.052,7.933 -10.091,7.941 -10.131,7.946 -10.17,7.949 -10.21,7.95 -12.25,7.95
  Top Layer region: -12.25,9.95 -12.25,8.43 -10.21,8.43 -10.17,8.431 -10.131,8.434 -10.091,8.439 -10.052,8.447 -10.013,8.456 -9.975,8.467 -9.938,8.48 -9.901,8.496 -9.865,8.513 -9.83,8.532 -9.796,8.553 -9.763,8.575 -9.732,8.599 -9.701,8.625 -9.673,8.653 -9.645,8.681 -9.619,8.712 -9.595,8.743 -9.573,8.776 -9.552,8.81 -9.533,8.845 -9.516,8.881 -9.5,8.918 -9.487,8.955 -9.476,8.993 -9.467,9.032 -9.459,9.071 -9.454,9.111 -9.451,9.15 -9.45,9.19 -9.451,9.23 -9.454,9.269 -9.459,9.309 -9.467,9.348 -9.476,9.387 -9.487,9.425 -9.5,9.462 -9.516,9.499 -9.533,9.535 -9.552,9.57 -9.573,9.604 -9.595,9.637 -9.619,9.668 -9.645,9.699 -9.673,9.727 -9.701,9.755 -9.732,9.781 -9.763,9.805 -9.796,9.827 -9.83,9.848 -9.865,9.867 -9.901,9.884 -9.938,9.9 -9.975,9.913 -10.013,9.924 -10.052,9.933 -10.091,9.941 -10.131,9.946 -10.17,9.949 -10.21,9.95 -12.25,9.95
  Keep-Out Layer region: 3.03,10.42 9.35,10.42 9.35,6.74 3.03,6.74
  Keep-Out Layer region: 3.03,10.42 9.35,10.42 9.35,6.74 3.03,6.74
  Keep-Out Layer region: 3.03,10.42 9.35,10.42 9.35,6.74 3.03,6.74
  Keep-Out Layer region: 3.03,10.42 9.35,10.42 9.35,6.74 3.03,6.74
  Keep-Out Layer region: 3.03,10.42 9.35,10.42 9.35,6.74 3.03,6.74
  Keep-Out Layer region: 3.03,10.42 9.35,10.42 9.35,6.74 3.03,6.74
  Keep-Out Layer region: 3.03,10.42 9.35,10.42 9.35,6.74 3.03,6.74
  Keep-Out Layer region: 3.03,10.42 9.35,10.42 9.35,6.74 3.03,6.74
  Keep-Out Layer region: 3.03,10.42 9.35,10.42 9.35,6.74 3.03,6.74
  silkscreen extent -13.07,-17.14 11.05,17.14, body extent -11.05,-16.9 11.05,16.88, height 1.85
AVAG-HSMX-C150_V [mm] "SMD, 2-Leads, Body 3.2x1.6mm"
  rect 1.5x1.5 smd: 1(-1.75,0) 2(1.75,0)
  silkscreen extent -0.6,-0.8 3,0.8, body extent -1.6,-0.8 1.6,0.8, height 1.1
"CAP 0603_1608" [mm] "Chip Capacitor, 2-Leads, Body 1.60x0.80mm, IPC Medium Density"
  rect 0.9x1 smd: 1(-0.675,0) 2(0.675,0)
  silkscreen extent -1.4,-0.7 1.4,0.7, body extent -0.8,-0.41 0.8,0.41, height 0.82
DDC0005A_M [mm] "SOT23, 5-Leads, Body 3.05x1.75mm, Pitch 0.95mm, IPC Low Density"
  rrect15% 1.2x0.65 smd: 1(-1.475,0.95) 2(-1.475,0) 3(-1.475,-0.95) 4(1.475,-0.95) 5(1.475,0.95)
  silkscreen extent -1.6,-1.55 0.5,1.95, body extent -0.88,-1.52 0.87,1.53, height 1.1
"RES 1206_3216" [mm] "Chip Resistor, 2-Leads, Body 3.13x1.55mm, IPC Medium Density"
  rect 1.2x1.65 smd: 1(-1.4,0) 2(1.4,0)
  silkscreen extent -2.3,-1.1 2.3,1.1, body extent -1.57,-0.8 1.62,0.8, height 0.6

## Part data
C1 C3 C4: library part CC0603KRX7R6BB105, "CAP CER 1UF 10V X7R 0603", Device Package="0603 (1608 Metric)", Manufacturer=Yageo, Operating Temperature="-55°C ~ 125°C", Supplier Part Number 1=311-1796-1-ND, Temperature Coefficient=X7R, Tolerance=±10%, Voltage - Rated=10V, Applications="General Purpose", Capacitance=1µF, ComponentLink1Description=Datasheet, ComponentLink1URL=https://www.yageo.com/upload/media/product/productsearch/datasheet/mlcc/UPY-GPHC_X7R_6.3V-to-50V_18.pdf, ComponentLink2Description="DigiKey Link", ComponentLink2URL=http://digikey.com/product-detail/en/yageo/CC0603KRX7R6BB105/311-1796-1-ND/5195698, LastUpdated="1/21/2020 12:02:09 AM", Lifecycle Status=Active, Minimum Order=1, Mounting Type="Surface Mount, MLCC", Package / Case="0603 (1608 Metric)", Packaging=TapeAndReel, PartId=2290, Part Number=CC0603KRX7R6BB105, Part Status=Active, Price=0.02, Series=CC, Size / Dimension="0.063\" L x 0.031\" W (1.60mm x 0.80mm)", Supplier 1=DigiKey, Thickness (Max)="0.035\" (0.90mm)"
C2: library part 06031A101FAT2A, "CAP CER 100PF 100V C0G/NP0 0603", Device Package="0603 (1608 Metric)", Manufacturer="AVX Corporation", Operating Temperature="-55°C ~ 125°C", Supplier Part Number 1=478-3671-1-ND, Temperature Coefficient="C0G, NP0", Tolerance=±1%, Voltage - Rated=100V, Applications="General Purpose", Capacitance=100pF, ComponentLink1Description=Datasheet, ComponentLink1URL=http://datasheets.avx.com/C0GNP0-Dielectric.pdf, ComponentLink2Description="DigiKey Link", ComponentLink2URL=http://digikey.com/product-detail/en/avx-corporation/06031A101FAT2A/478-3671-1-ND/1116369, LastUpdated="1/21/2020 12:02:09 AM", Lifecycle Status=Active, Minimum Order=1, Mounting Type="Surface Mount, MLCC", Package / Case="0603 (1608 Metric)", Packaging=TapeAndReel, PartId=2633, Part Number=06031A101FAT2A, Part Status=Active, Price=0.10, Series=-, Size / Dimension="0.063\" L x 0.032\" W (1.60mm x 0.81mm)", Supplier 1=DigiKey, Thickness (Max)="0.035\" (0.90mm)"
DS1: library part CMP-2000-05061-1, "Chip LED, Green, 65 mW, 25 mA, -40 to 85 degC, 2-Pin SMD, RoHS, Tape and Reel", Forward Current If=20mA, Forward Voltage=2.2V, Forward Voltage VF Max=2.6V, LED Colour=Green, Manufacturer=Avago, Operating Temperature Max=85degC, Operating Temperature Min=-30degC, Operating Temperature Range=-30degCto+85degC, Opto Case Style=SMD, Package Description="2-Pin Surface Mount Device, Body 3.2 x 1.6 mm", Package Reference=HSMX-C150, Reverse Protection Voltage=5V, Storage Temperature Min=-40degC, Bulb Size=1.6mmx2mm, Datasheet URL=https://datasheet.ciiva.com/11774/0900766b804a6539-11774272.pdf, Datasheet Version=Mar-12, Dominant Wavelength=572nm, External Depth=1.1mm, External Length / Height=3.2mm, External Width=1.6mm, Forward Current If Max=20mA, LED Mounting=SMD, LED Type=Standard, Lens Shape=Rectangular, Light Output Orientation=TopEmitting, Luminous Intensity=15mcd, Luminous Intensity @ If Min=4.5mcd, Luminous Intensity Typ=15mcd, Manufacturer URL=http://www.avagotech.com/, Material=GaP, Mounting Type=SMD, MSL=MSL2A-4weeks, No. of Pins=2, Opto Mounting Orientation=Top, Packaging=CutTape, Peak Wavelength=570nm, PIV Max=5V, Storage Temperature Max=85degC, SVHC=NoSVHC(16-Jun-2014), Viewing Angle=170deg, Voltage Vf Min=2.2V, Voltage Vf Typ=2.2V, Wavelength Typ=572nm
P1: library part CMP-1502-01102-1, "THT Vertical Pin Header WR-PHD, Pitch 2.54 mm, Single Row, 20 pins", Contact Resistance=20mOhm, Manufacturer="Wurth Elektronik", Operating Temperature=-40to105degC, Rated Current=3A, Withstanding Voltage=500VAC, Working Voltage=250VAC, Datasheet URL=https://katalog.we-online.de/em/datasheet/6130xx11121.pdf, Gender=Male, Manufacturer URL=http://www.we-online.de, Mounting Technology=THT, Orientation=Vertical, Package Reference=61302011121, Packaging=Bag, Part Number=61302011121, Pin Number=20, Pitch=2.54mm, Publisher=WurthElektronik, Row Number=Single
R1: library part CR1206-FX-56R0ELF, "RES SMD 56 OHM 1% 1/4W 1206", Device Package="1206 (3216 Metric)", Manufacturer="Bourns Inc.", Operating Temperature="-55°C ~ 155°C", Power (Watts)="0.25W, 1/4W", Supplier Device Package=1206, Supplier Part Number 1=CR1206-FX-56R0ELFCT-ND, Temperature Coefficient=±100ppm/°C, Tolerance=±1%, ComponentLink1Description=Datasheet, ComponentLink1URL=https://www.bourns.com/docs/Product-Datasheets/CHPREZTR.pdf, ComponentLink2Description="DigiKey Link", ComponentLink2URL=http://digikey.com/product-detail/en/bourns-inc/CR1206-FX-56R0ELF/CR1206-FX-56R0ELFCT-ND/3767738, Composition="Thick Film", Features="Moisture Resistant", Height - Seated (Max)="0.030\" (0.75mm)", LastUpdated="1/21/2020 1:08:34 AM", Lifecycle Status=Active, Minimum Order=1, Number of Terminations=2, Package / Case="1206 (3216 Metric)", Packaging=TapeAndReel, PartId=26887, Part Number=CR1206-FX-56R0ELF, Part Status=Active, Price=0.01, Resistance="56 Ohms", Series=CR1206, Size / Dimension="0.126\" L x 0.063\" W (3.20mm x 1.60mm)", Supplier 1=DigiKey
U1: library part CMP-0394-01056-2, "Single Output LDO, 200 mA, Fixed 3.3 V Output, 2 to 5.5 V Input, with Low IQ, 5-pin SOT (DDC), -40 to 125 degC, Green (RoHS & no Sb/Br)", Manufacturer="Texas Instruments", Accuracy(%)=2, Code_JEDEC=MO-193, ComponentLink1Description="Manufacturer URL", ComponentLink1URL=http://www.ti.com/, ComponentLink2Description=Datasheet, ComponentLink2URL=http://www.ti.com/general/docs/lit/getliterature.tsp?genericPartNumber=TLV70033&fileType=pdf, ComponentLink3Description="Package Specification", ComponentLink3URL=http://www.ti.com/litv/pdf/mpds123d, DatasheetVersion=SLVSA00D, Eco-Plan="Green (RoHS & no Sb/Br)", Fixed Output Options(V)=3.3, Iout(Max)(A)=0.2, Iq(Typ)(mA)=0.03, Mounting Technology="Surface Mount", PackageDescription="5-Pin Plastic Small Outline, Body 2.9 x 1.6 mm, 0.95 mm Pitch", PackageReference=DDC0005A, PackageVersion=4204403-2/E, PartNumber=TLV70033DDCR, SubFamily="Single Channel LDO", Vdo(Typ)(mV)=175, Vin(Max)(V)=5.5, Vin(Min)(V)=2, Vout Adj(Max)(V)=3.3, Vout Adj(Min)(V)=3.3

## Free pads (board coordinates)
  round 60 hole 130: 1(520,120) 1(540,1965) 1(1960,120) 1(1970,1965)

## Via types
v1: diameter 50, hole 28, Top Layer to Bottom Layer, 23 vias
v2: diameter 19.68, hole 11.81, Top Layer to Bottom Layer, 9 vias

## Nets (pads, with @x,y where several pads share a name; then routed paths per layer and width w, separated by ;. In a path a pad name is that pad's centre, name@x,y a point inside that pad or via, vN(x,y) a via of type N, cw(c..) or ccw(c..) an arc to the next point about the centre after c; other vN are vias at no path point)
3V3: A1.2 C1.2 C2.2 C4.2 U1.5 | length 578.1
  Top Layer w12: 726.57,1498.43 761.14,1463.86 A1.2 A1.2@808.86,1461.97
  Top Layer w15: v1(525,1565) 525,1560 570,1515 C1.2 620,1505 678.43,1505 685,1498.43 C2.2 726.57,1498.43
  Bottom Layer w15: U1.5 587.6,1702.6 590,1705 590,1630 v1(525,1565)
5V: C3.2 P1.1 U1.1 U1.3 | length 623.6
  Bottom Layer w12: P1.1 P1.1@85,1985
  Bottom Layer w15: P1.1@85,1985 180,1985 310,1855 C3.2 319.17,1777.4 U1.3 442.6,1777.4 455,1765 455,1715 440,1700 399.53,1700 U1.1
DI8/DTR: A1.10 P1.7 | length 964.3
  Top Layer w12: P1.7 180,1390 740,830 806.81,830 A1.10
DIN: A1.4 P1.3 | length 931.1
  Top Layer w12: P1.3 155,1790 638.62,1306.38 A1.4
DIO0/AD0: A1.33 P1.13 | length 2479.7
  Top Layer w12: P1.13 85,795 90,790 145,845 v1(345,845) ; A1.33 A1.33 1785,1465 1850,1530 v1(1850,1680)
  Bottom Layer w12: v1(345,845) 350,845 1185,1680 v1(1850,1680) v1@1855,1680
DIO1/AD1: A1.32 P1.14 | length 2195.8
  Top Layer w12: P1.14 155,765 v1(345,765) ; A1.32 1711.3,1370 1711.3,1400 1726.3,1385 v1(1820,1385)
  Bottom Layer w12: v1(345,765) 925,1345 1780,1345 v1(1820,1385)
DIO2/AD2: A1.31 P1.15 | length 2418.4
  Top Layer w12: P1.15 170,680 v1(320,680) ; A1.31 1702.44,1315 1727.44,1290 v1(1945,1290)
  Bottom Layer w12: v1(320,680) 355,680 965,1290 v1(1945,1290)
DIO3/AD3: A1.30 P1.16 | length 2276.1
  Top Layer w12: P1.16 190,600 v1(350,600) ; A1.30 1701.18,1235 1721.18,1215 v1(1870,1215)
  Bottom Layer w12: v1(350,600) 965,1215 v1(1870,1215)
DIO4: A1.24 P1.20 | length 2144
  Top Layer w12: P1.20 v1(335,90) ; A1.24 1816.38,756.38 v1(1820,760)
  Bottom Layer w12: v1(335,90) 860,615 1675,615 v1(1820,760)
DIO6/RTS: A1.29 P1.17 | length 2164
  Top Layer w12: P1.17 195,505 v1(355,505) ; A1.29 1705.08,1140 1710.08,1145 v1(1810,1145)
  Bottom Layer w12: v1(355,505) 995,1145 v1(1810,1145)
DIO7/CTS: A1.25 P1.19 | length 2294.2
  Top Layer w12: P1.19 155,265 v1(415,265) ; A1.25 1709.88,850 1720.28,850 1735.16,835.12 1860.12,835.12 v1(1865,840)
  Bottom Layer w12: v1(415,265) 415,360 895,840 v1(1865,840)
DOUT: A1.3 P1.2 | length 960.4
  Top Layer w12: P1.2 155,1890 435,1610 435,1575 624.88,1385.12 A1.3
GND: A1.1 A1.11 A1.13 A1.22 A1.35 A1.38 C1.1 C2.1 C3.1 C4.1 DS1.2 P1.8 U1.2 | length 946
  Top Layer w10: v1@1783.9,598.9 v1(1785,600)
  Top Layer w12: P1.8 P1.8@80,1295 ; C1.1@611.85,1570 640,1570 655,1555 C2.1@681.57,1555 ; C2.1@685,1551.57 693.98,1542.6 A1.1 808.35,1545 930,1545 v1(932.5,1547.5) ; v1(716.36,596.36) 717.72,597.72 A1.13 A1.13@820,588.46 ; A1.11 v1(934.8,755.2) ; A1.38 A1.38@1065.87,1430 ; A1.22@1690,593.9 A1.22@1691.1,595 ; A1.22@1695,595 A1.22@1691.1,595 ; A1.35 1777.48,1622.52 v1(1778.11,1621.89) ; v1@1783.9,598.9 A1.22 A1.22@1691.1,595 ; v1(2000,705) DS1.2
  Top Layer w15: C1.1 C1.1@611.85,1570 ; C2.1@681.57,1555 C2.1@685,1551.57
  Bottom Layer w15: C3.1@305,1733.43 311.57,1740 U1.2
  other v2: 1020,1385 1060,1385 1100,1385 1020,1425 1060,1425 1100,1425 1020,1465 1060,1465 1100,1465
NetA1_28: A1.28 R1.1 | length 190.6
  Top Layer w12: A1.28 1883.66,1071.34 R1.1
NetDS1_1: DS1.1 R1.2 | length 147
  Top Layer w12: R1.2 1995.24,929.76 DS1.1
ON/SLEEP: A1.26 P1.18 | length 2111.1
  Top Layer w12: P1.18 185,395 v1(345,395) ; A1.26 v1(1813.86,913.86)
  Bottom Layer w12: v1(345,395) 863.86,913.86 v1(1813.86,913.86)
PWM0: A1.7 P1.5 | length 946.1
  Top Layer w12: P1.5 190,1590 709.84,1070.16 A1.7
PWM1: A1.8 P1.6 | length 937.3
  Top Layer w12: P1.6 200,1490 698.58,991.42 A1.8
RESET: A1.6 P1.4 | length 954.9
  Top Layer w12: P1.4 170,1690 711.1,1148.9 A1.6
SPI_CLK: A1.14 P1.9 | length 1515.8
  Top Layer w12: P1.9 305,1190 655,840 655,520 790,385 935,385 980,430 980,505.24 A1.14
SPI_MISO: A1.17 P1.12 | length 1883.1
  Top Layer w12: P1.12 105,915 345,915 485,775 485,415 715,185 1050,185 1215,350 1215,505.51 A1.17
SPI_MOSI: A1.16 P1.11 | length 1765.9
  Top Layer w12: P1.11 360,990 530,820 530,460 745,245 1015,245 1135,365 1135,504.25 A1.16
SPI_SSEL: A1.15 P1.10 | length 1635.1
  Top Layer w12: P1.10 330,1090 590,830 590,485 755,320 970,320 1060,410 1060,503.98 A1.15
pads on no net: A1.5 A1.9 A1.12 A1.18 A1.19 A1.20 A1.21 A1.23 A1.27 A1.34 A1.36 A1.37 U1.4

## Polygon pours and split planes (outlines as drawn)
no net on Top Layer "Top Layer-No Net" (solid, pour order 8): 2100,0 2100,-5 2095,-5
no net on Top Layer "Top Layer-No Net 1" (solid, pour order 6): 2100,0
no net on Top Layer "Top Layer-No Net 2" (solid, pour order 4): 2095,-5
no net on Top Overlay (solid): 450,1170
no net on Top Overlay (solid): 1445,335
GND on Bottom Layer "Bottom Layer-GND" (solid, pour order 30): 15,2065 2075,2065 2075,15 15,15

## Silkscreen, mask and mechanical layers (free items; w line width, h text height)
Top Overlay:
  text "5V0" at 155,1965 h40
  text "DOUT" at 155,1870 h40
  text "DIN" at 160,1770 h40
  text "RES" at 160,1670 h40
  text "PWM0" at 160,1570 h40
  text "PWM1" at 160,1470 h40
  text "DIO8" at 160,1370 h40
  text "GND" at 160,1270 h40
  text "SCLK" at 160,1170 h40
  text "SSEL" at 160,1070 h40
  text "MOSI" at 160,970 h40
  text "MISO" at 160,870 h40
  text "DIO0" at 160,770 h40
  text "DIO1" at 160,670 h40
  text "DIO2" at 160,575 h40
  text "(DIO5)" at 1860,540 h40
  text "DIO3" at 160,475 h40
  text "DIO6" at 160,370 h40
  text "ON" at 160,270 h40
  text "DIO7" at 160,170 h40
  text "DIO4" at 160,75 h40
Mechanical 15:
  lines w10: 0,2075 5,2080 2090,2080 2090,10 ; 0,2080 0,5 2085,5